# EAGLE board HOR_water_tight_microUSB_raiser (EAGLE 9.7.0)
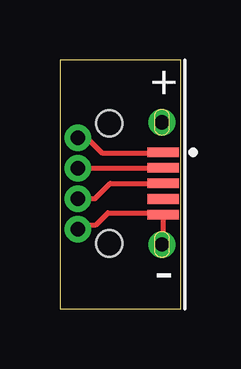
[diagram p0: board, top side]
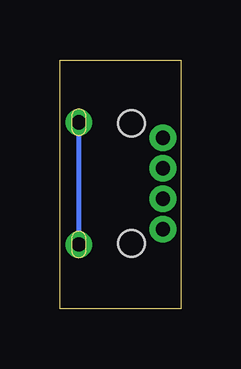
[diagram p1: board, bottom side, seen from below]

Size 5.05 x 10.38 mm. Coordinates in mm from the lower left corner, seen from the top.
Outline: 0,10.37 0,10.36
Outline: 0,10.36 0,0 5.05,0 5.05,10.38 0,10.38 0,10.36
Copper layers (1*16): Top 0.035mm / dielectric 1.5mm / Bottom 0.035mm
Design rules "watch": minimum track width 4mil, minimum drill 0.008890625mm, track to track 5mil, track to pad 5mil, pad to pad 5mil, via to via 5mil, smd to smd 5mil, copper to edge 2.5mil, drill to drill 5mil, minimum pad ring 10mil, minimum via ring 8mil, stop-mask expansion 4mil, vias tented up to drill 0.008890625mm, thermal gap 10mil

## Footprints (pad centres in the part's own frame; a part is rotated, then mirrored left to right if it is on the bottom)
CUI_UJ2-MIBH-4-SMT-TR-67 = smd 1.3 x 0.4: 1 4.25,1.3; 2 4.25,0.65; 3 4.25,0; 4 4.25,-0.65; 5 4.25,-1.3 | drill 0.6: S1 4.2,2.55; S2 4.2,-2.55 | hole 1.1: 2,2.5; 2,-2.5
4X1.27MALE_HHEADER = drill 0.6 pad 0.9: 1 1.27,0; 2 1.27,-1.27; 3 1.27,-2.54; 4 1.27,-3.81

## Placement (x,y rotation side)
U$1  VERTICAL_MICRO_USBCUI_HOR_T4  [CUI_UJ2-MIBH-4-SMT-TR-67]  0.06,5.22 0 top
U$2  4X1.27MALE_HEADER  [4X1.27MALE_HHEADER]  2.02,7.13 0 bottom

## Library data of the parts
U$1 U$2 = MY_CLOCK_LIB_COMPONENTS

## Nets
D+: U$1.3 U$2.3
D-: U$1.2 U$2.2
GND: U$1.5 U$1.S1 U$1.S2 U$2.4
VBBUS: U$1.1 U$2.1

## Tracks (layer width: path | path; a pad name or v marks a point on that pad's centre or on a via)
D+
  Top 0.203: U$2.3 1.46,4.59 2.1,5.22 U$1.3
D-
  Top 0.203: U$2.2 4.29,5.86 U$1.2
GND
  Top 0.203: U$2.4 0.93,3.5 1.5,3.5 2,4 4.24,4 U$1.5 4.31,2.72 U$1.S2
  Bottom 0.203: U$1.S1 U$1.S2
VBBUS
  Top 0.203: U$2.1 1.12,7.13 1.75,6.5 4.29,6.5 U$1.1

## Text on the board
tPlace: + | -